# Altium PCB PCB1 - 副本.PcbDoc
Units mm, origin at the board's own origin, x right, y up, seen from the top; angles counter-clockwise.
Board outline 15.62 x 11.05 mm, 2 copper layers (Top Layer, Bottom Layer); 10 components, 8 nets, 55 pads, 8 vias.
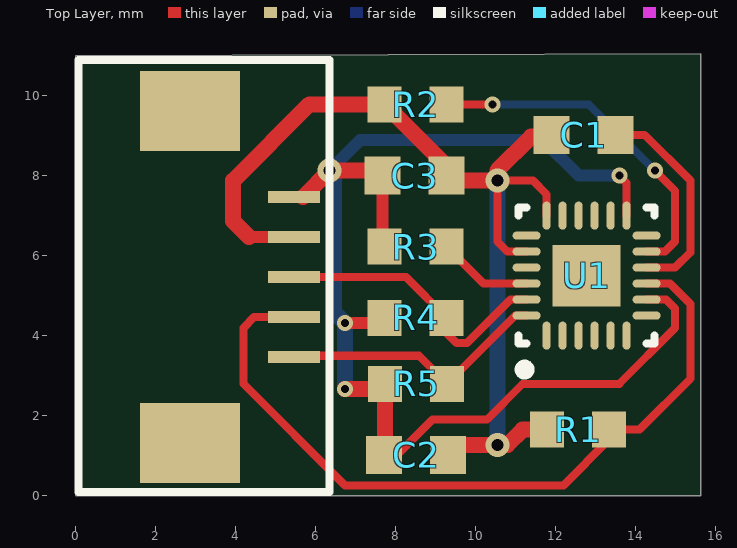
[diagram p0: Top Layer view]
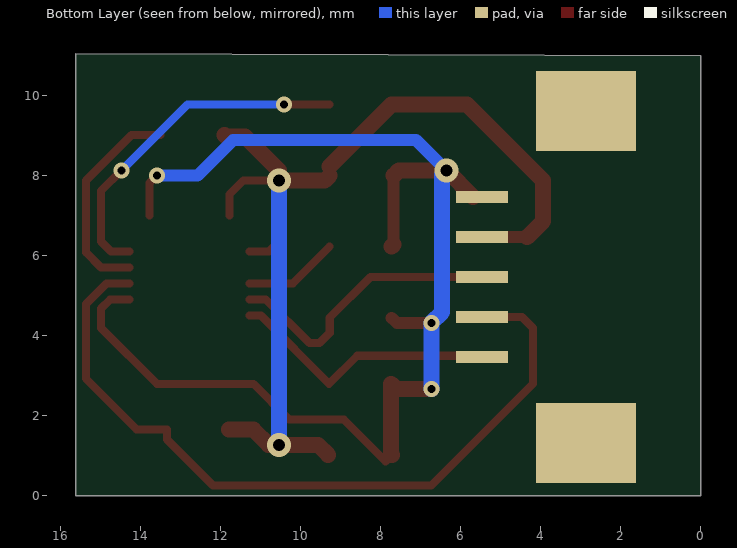
[diagram p1: Bottom Layer view, seen from below]

## Layer stack, top to bottom
Top Solder: solder mask 0.0102, Solder Resist, Dk 3.5
Top Layer: signal copper 0.0356
Dielectric 1: dielectric 0.32, FR-4, Dk 4.8
Bottom Layer: signal copper 0.0356
Bottom Solder: solder mask 0.0102, Solder Resist, Dk 3.5

## Board outline
0,0 15.621,0 15.621,11.047 0,11

## Design rules (kind name [scope] priority, off if disabled: settings)
Clearance [All] p1: gap=0.15 ignorepadtopadclearanceinfootprint=TRUE except(0: Arc-Hole Track-Hole SMDPad-Hole THPad-Hole Via-Hole Fill-Hole Poly-Hole Region-Hole Text-Hole)
MinimumSolderMaskSliver [All] p1: minsoldermaskwidth=0.2
PolygonConnect [All] p1: connectstyle=Relief reliefconductorwidth=0.254 reliefentries=4 polygonreliefangle="90 Angle" airgapwidth=0.254
RoomDefinition Sheet1 [InComponentClass('Sheet1')] p1: confinementstyle=ConfineIn formatcopy=TRUE lockcomponents=FALSE outline -12.027,9.525 35.344,9.525 35.344,22.86 -12.027,22.86
RoutingVias [All] p1: holewidth=0.2 width=0.4 viastyle="Through Hole" minholewidth=0.15 minwidth=0.3 maxholewidth=0.711 maxwidth=1.27
SilkToSolderMaskClearance [IsPad] p1: minsilkscreentomaskgap=0.2 clearancetoexposedcopper=TRUE
SolderMaskExpansion [All] p1: expansion=0.102
Width [All] p1: maxlimit=2.032 minlimit=0.2 preferedwidth=0.2
28 further rules are at their usual default settings.

## Components (designator, comment, footprint, x,y, rotation, side; value= is the part's Value field where it differs from the comment)
* "FPCPin" FPCPin_5 5.461,7.461 r270 top locked
C1 "C0603" CAPC1608X09N 12.7,9.017 r0 top value=0.1uF
C2 "C0603" CAPC1608X09N 8.509,1.016 r180 top value=10nF
C3 "C0603" CAPC1608X09N 8.471,8.001 r0 top value=0.1uF
R1 "R0603" RESC1608X09N 12.56,1.651 r180 top value=4.7K
R2 "R0603" RESC1608X09N 8.496,9.779 r180 top value=4.7K
R3 "R0603" RESC1608X09N 8.496,6.223 r0 top value=4.7K
R4 "R0603" RESC1608X09N 8.496,4.445 r0 top value=470
R5 "R0603" RESC1608X09N 8.509,2.794 r0 top value=470
U1 "MPU6500" QFN40P300X300X90_HS-25N 12.773,5.5 r90 top locked

## Footprints (in the part's own frame and the unit in brackets; to place one, negate y for a bottom-side part, rotate by r counter-clockwise, add the part's x,y. Pads: shape width x height; smd on the part's side, far side on the other; paste and mask are expansions set on the pad)
CAPC1608X09N [mm] "Chip Capacitor, 2-Leads, Body 1.60x0.80mm, IPC Medium Density"
  rect 0.9x0.95 smd: 1(-0.8,0) 2(0.8,0)
  body extent -0.85,-0.45 0.85,0.45, height 0.9
FPCPin_5 [mm]
  rect 2x2.5 smd: A1(-2.15,-2.6) A1(6.15,-2.6)
  rect 0.3x1.3 smd: AD0(3,0) GND(1,0) SCL(2,0) SDA(4,0) VCC(0,0)
  rect 2x2.5 smd far side: B1(-2.15,-2.6) B1(6.15,-2.6)
  rect 0.3x1.3 smd far side: B1(0,0) B2(1,0) B3(2,0) B4(3,0) B5(4,0)
  silkscreen extent -3.43,-5.39 7.37,0.89
QFN40P300X300X90_HS-25N [mm] "QFN, 24-Leads, Body 3.00x3.00mm, Pitch 0.40mm, Thermal Pad 1.54x1.70mm, IPC Medium Density"
  oval 0.7x0.2 smd: 1(-1.5,1) 2(-1.5,0.6) 3(-1.5,0.2) 4(-1.5,-0.2) 5(-1.5,-0.6) 6(-1.5,-1) 13(1.5,-1) 14(1.5,-0.6) 15(1.5,-0.2) 16(1.5,0.2) 17(1.5,0.6) 18(1.5,1)
  oval 0.2x0.7 smd: 7(-1,-1.5) 8(-0.6,-1.5) 9(-0.2,-1.5) 10(0.2,-1.5) 11(0.6,-1.5) 12(1,-1.5) 19(1,1.5) 20(0.6,1.5) 21(0.2,1.5) 22(-0.2,1.5) 23(-0.6,1.5) 24(-1,1.5)
  rect 1.54x1.7 smd: 25(0,0)
  silkscreen extent -2.47,-1.7 1.7,1.7, body extent -1.55,-1.55 1.55,1.55, height 0.9
RESC1608X09N [mm] "Chip Resistor, 2-Leads, Body 1.60x0.80mm, IPC Medium Density"
  rect 0.85x0.9 smd: 1(-0.775,0) 2(0.775,0)
  body extent -0.85,-0.45 0.85,0.45, height 0.9

## Part data
U1: library part Component_1

## Via types
v1: diameter 0.4, hole 0.2, Top Layer to Bottom Layer, 5 vias
v2: diameter 0.6, hole 0.3, Top Layer to Bottom Layer, 3 vias

## Nets (pads, with @x,y where several pads share a name; then routed paths per layer and width w, separated by ;. In a path a pad name is that pad's centre, name@x,y a point inside that pad or via, vN(x,y) a via of type N, cw(c..) or ccw(c..) an arc to the next point about the centre after c; other vN are vias at no path point)
AD0: *.AD0 R1.1 U1.9 | length 19.4
  Top Layer w0.2: R1.1 14.097,1.651 15.367,2.921 15.367,4.787 14.854,5.3 U1.9
  Top Layer w0.203: *.AD0 4.461,4.461 4.191,4.191 4.191,2.794 6.731,0.254 12.192,0.254 13.335,1.397 R1.1
GND: *.GND C1.1 C2.1 C3.2 R1.2 R2.2 U1.18 U1.20 | length 26.6
  Top Layer w0.2: C3.2 C3.2@9.271,8.229 ; U1.20 10.791,6.1 10.541,6.35 v2(10.541,7.874) 11.43,7.874 11.773,7.531 U1.18
  Top Layer w0.3: 4.334,6.461 *.GND
  Top Layer w0.4: 4.334,6.461 3.937,6.858 3.937,7.874 5.842,9.779 R2.2 C3.2@9.271,8.229 ; C3.2 9.398,7.874 v2(10.541,7.874) 10.541,8.128 11.385,8.972 11.856,8.972 C1.1 ; C2.1 9.563,1.27 v2(10.541,1.27) 10.795,1.27 11.176,1.651 R1.2
  Bottom Layer w0.4: v2(10.541,1.27) v2(10.541,7.874)
NetC1_2: C1.2 U1.10 | length 5.4
  Top Layer w0.2: C1.2 14.225,9.017 15.367,7.875 15.367,6.081 14.986,5.7 U1.10
NetR2_1: R2.1 U1.11 | length 8.7
  Top Layer w0.2: R2.1 v1(10.414,9.779) ; U1.11 14.736,6.1 14.986,6.35 14.986,7.62 v1(14.478,8.128)
  Bottom Layer w0.2: v1(10.414,9.779) 12.827,9.779 v1(14.478,8.128)
NetR3_2: R3.2 U1.22 | length 2.4
  Top Layer w0.2: R3.2 10.194,5.3 U1.22
SCL: *.SCL R4.2 U1.23 | length 7.2
  Top Layer w0.203: *.SCL 8.255,5.461 R4.2 9.271,4.064 9.525,3.81 9.779,3.81 10.869,4.9 U1.23
SDA: *.SDA R5.2 U1.24 | length 6.8
  Top Layer w0.203: *.SDA 5.461,3.496 8.582,3.496 R5.2 10.99,4.5 U1.24
VCC3.3: *.VCC C2.2 C3.1 R3.1 R4.1 R5.1 U1.8 U1.13 | length 32.9
  Top Layer w0.2: C2.2 7.87,0.855 8.919,1.905 10.287,1.905 11.176,2.794 13.589,2.794 14.986,4.191 14.986,4.673 14.759,4.9 U1.8 ; v1(13.589,8.001) 13.773,7.817 U1.13
  Top Layer w0.3: *.VCC *.VCC@5.683,7.461 ; v1(6.731,4.318) 7.594,4.318 R4.1 ; R3.1@7.671,6.273 C3.1
  Top Layer w0.4: *.VCC@5.683,7.461 v2(6.35,8.128) 7.544,8.128 C3.1 ; v1(6.731,2.667) 7.607,2.667 R5.1 7.734,1.041 C2.2 ; R3.1@7.671,6.273 R3.1
  Bottom Layer w0.3: v2(6.35,8.128) 7.112,8.89 11.684,8.89 12.573,8.001 v1(13.589,8.001)
  Bottom Layer w0.4: v2(6.35,8.128) 6.461,8.017 6.461,4.588 v1(6.731,4.318) v1(6.731,2.667)
pads on no net: *.A1 *.B1 *.B2 *.B3 *.B4 *.B5 U1.1 U1.2 U1.3 U1.4 U1.5 U1.6 U1.7 U1.12 U1.14 U1.15 U1.16 U1.17 U1.19 U1.21 U1.25

## Silkscreen, mask and mechanical layers (free items; w line width, h text height)
Drill Drawing:
  the board outline again, w0.2